# Altium PCB IMUCubeCTRL_Pcb.PcbDoc
Units mil, origin at the board's own origin, x right, y up, seen from the top; angles counter-clockwise.
Board outline 866.14 x 866.14 mil, 2 copper layers (Top Layer, Bottom Layer), stack 38.583 mil thick; 27 components, 34 nets, 158 pads, 22 vias.
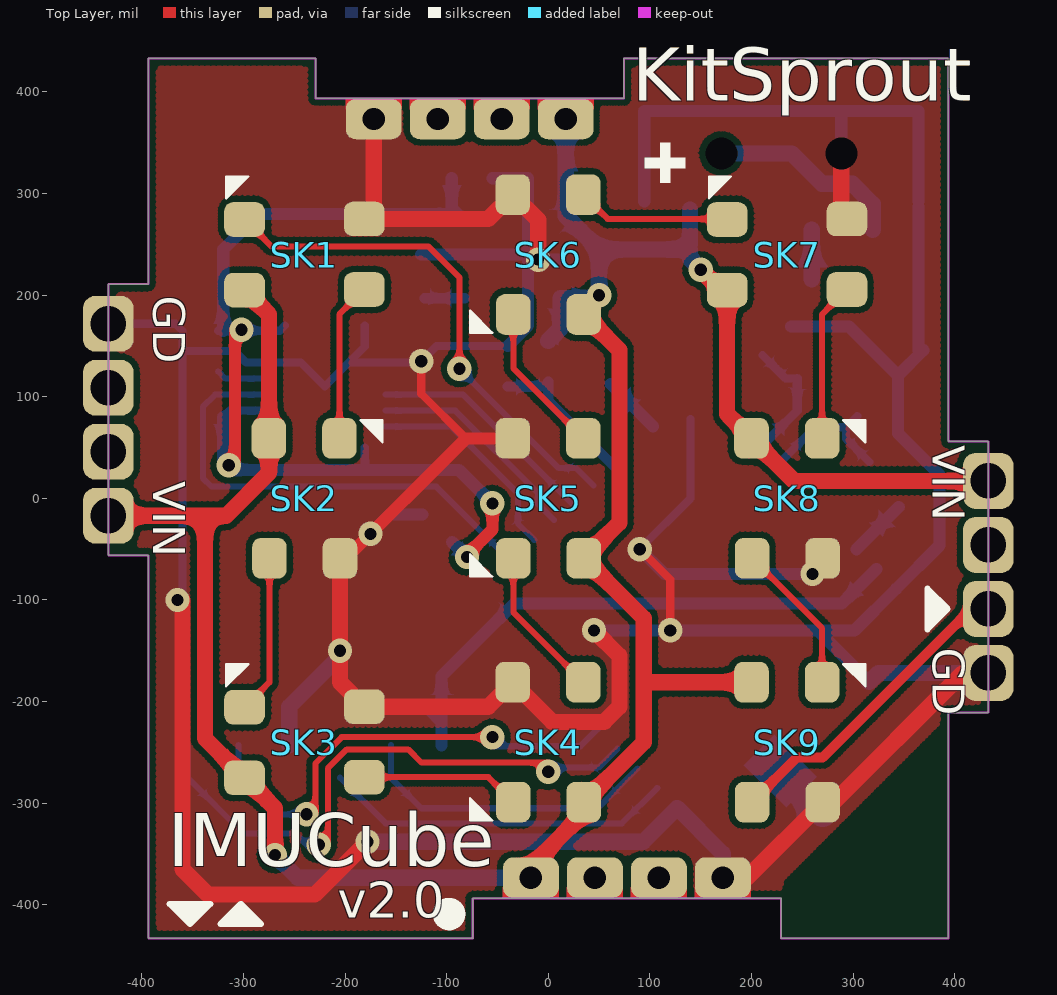
[diagram p0: Top Layer view]
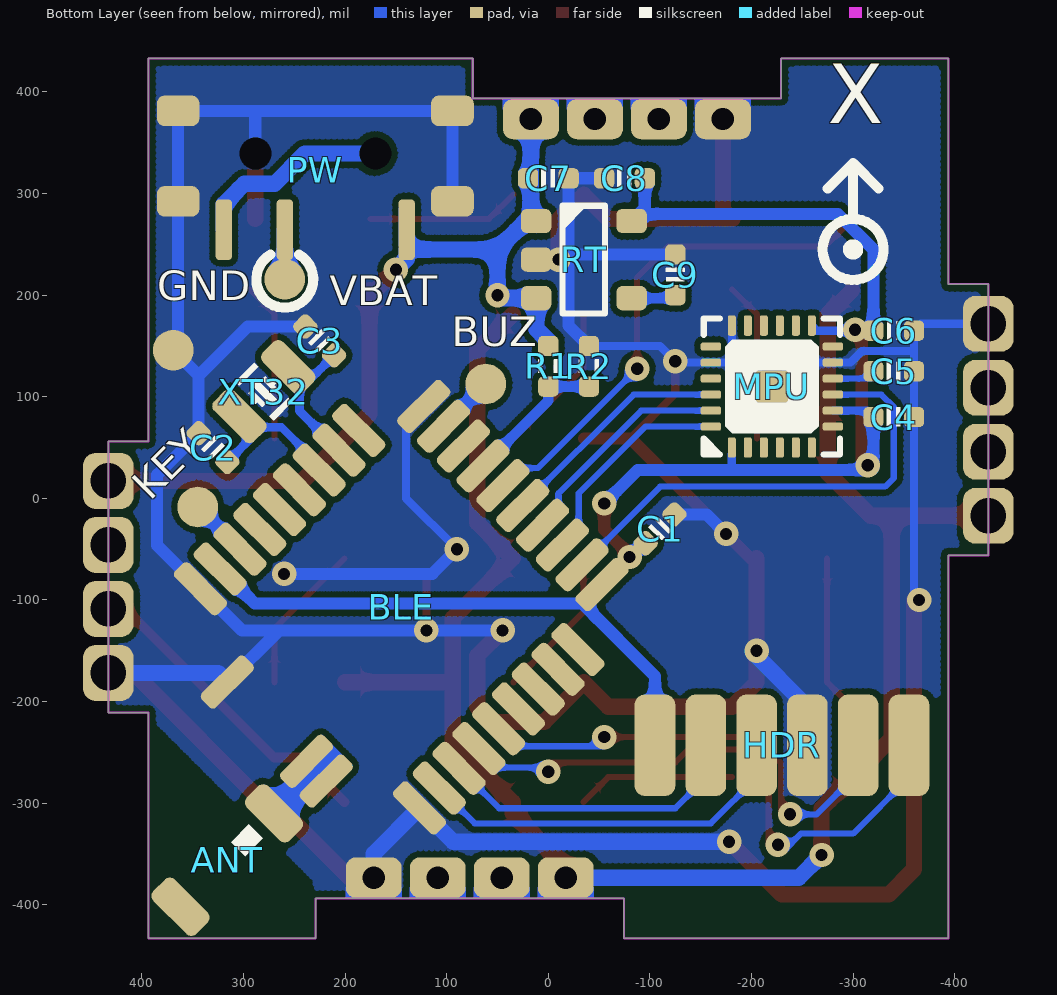
[diagram p1: Bottom Layer view, seen from below]
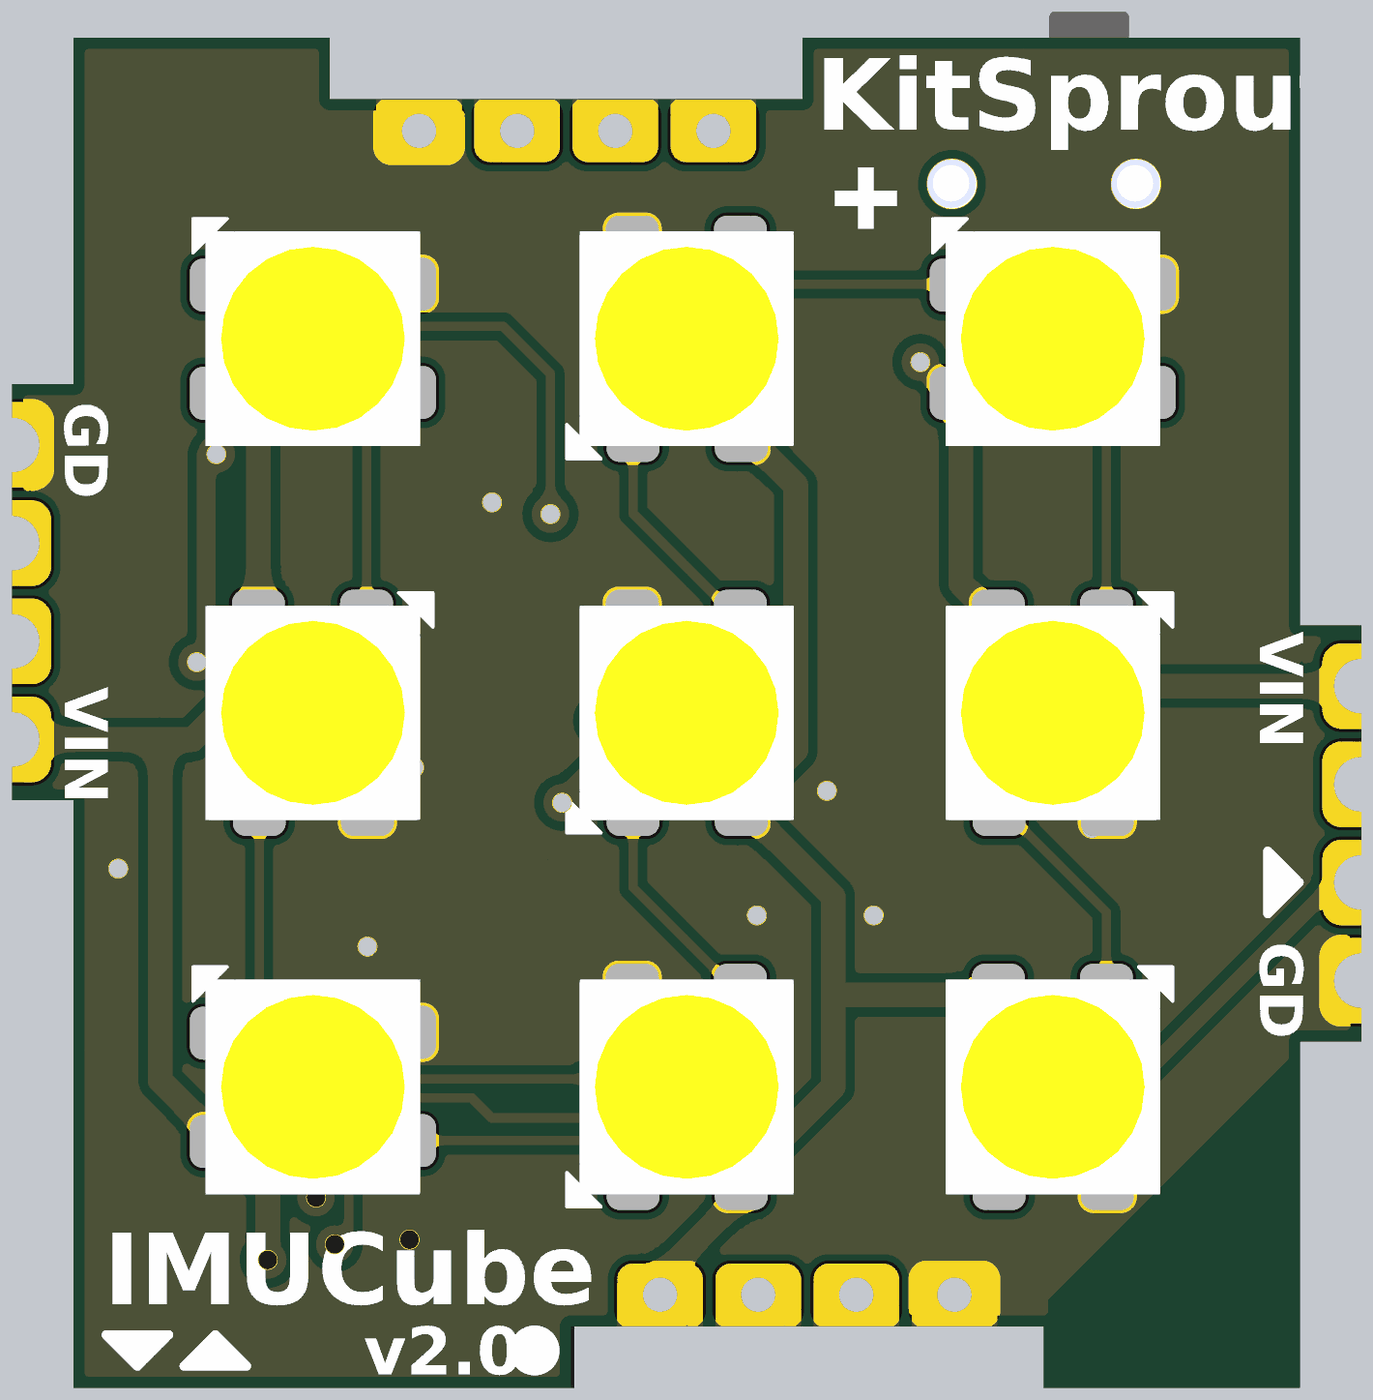
[diagram p2: 3D render of the assembled board from above, using the file's embedded part models]
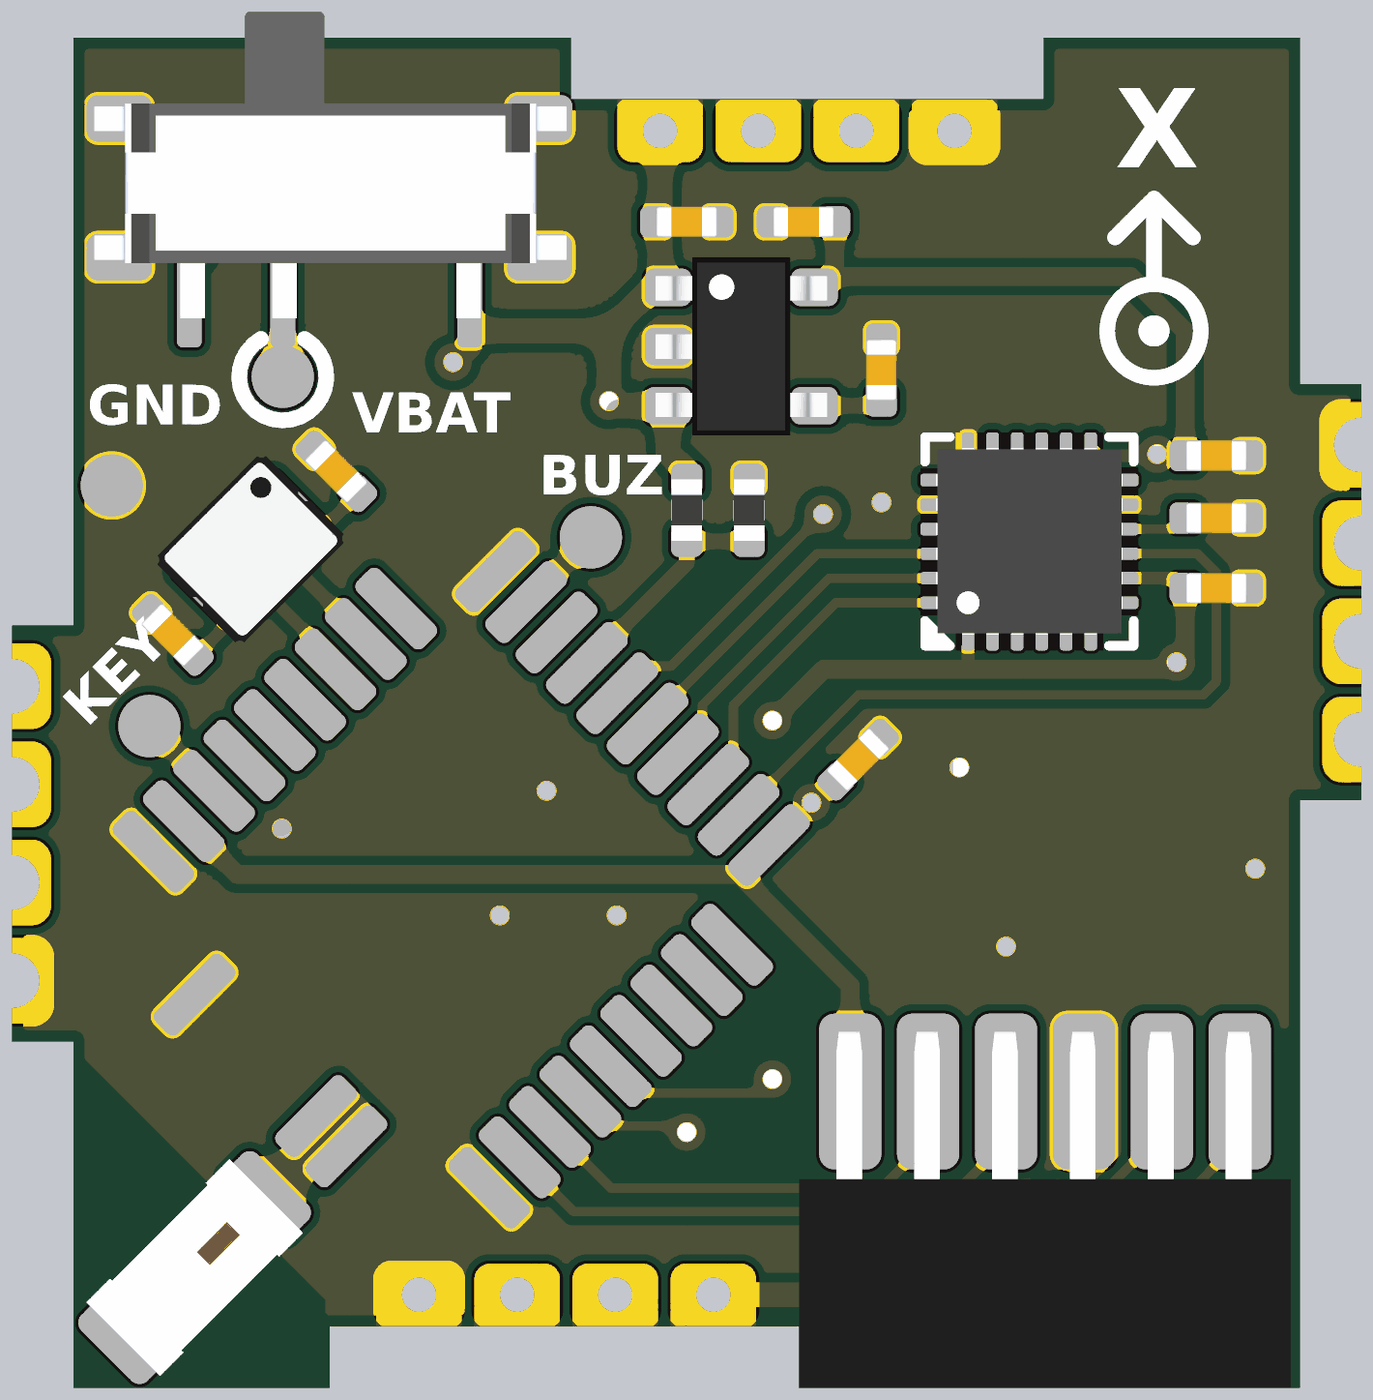
[diagram p3: 3D render of the assembled board from below, using the file's embedded part models]

## Layer stack, top to bottom
Top Solder: solder mask 0.3937, Solder Resist, Dk 3.5
Top Layer: signal copper 1.5748
Dielectric 1: dielectric 35.4331, FR-4, Dk 4.8
Bottom Layer: signal copper 1.5748
Bottom Solder: solder mask 0.3937, Solder Resist, Dk 3.5

## Board outline
-433.07,-56.06 -393.7,-56.06 -393.7,-433.07 -74.37,-433.07 -74.37,-393.7 229.09,-393.7 229.09,-433.07 393.7,-433.07 393.7,-210.79 433.07,-210.79 433.07,56.06 393.7,56.06 393.7,433.07 74.37,433.07 74.37,393.7 -229.09,393.7 -229.09,433.07 -393.7,433.07 -393.7,210.79 -433.07,210.79

## Design rules (kind name [scope] priority, off if disabled: settings)
Clearance ClearancePolygon [InPolygon] p1: gap=6
Clearance [All] p2: gap=6
ComponentClearance [All] p1: gap=0 collisioncheckmode=3 verticalgap=0 showdistances=FALSE
Height [All] p1: minheight=0 maxheight=5000 prefheight=500
HoleSize [All] p1: absolutevalues=TRUE maxlimit=200 minlimit=1 maxpercent=80.000 minpercent=20.000
HoleToHoleClearance [All] p1: gap=6 allowstackedmicrovias=TRUE
MinimumSolderMaskSliver [All] p1: minsoldermaskwidth=0
PolygonConnect [All] p1: connectstyle=Direct reliefconductorwidth=10 reliefentries=4 polygonreliefangle="90 Angle" airgapwidth=10
RoutingVias [All] p1: holewidth=12 width=24 viastyle="Through Hole" minholewidth=12 minwidth=20 maxholewidth=28 maxwidth=50
SilkToSilkClearance [All] p1: silktosilkclearance=0
SilkToSolderMaskClearance [IsPad] p1: minsilkscreentomaskgap=0 clearancetoexposedcopper=TRUE
SolderMaskExpansion [All] p1: expansion=2
Width [All] p1: maxlimit=50 minlimit=6 preferedwidth=10
23 further rules are at their usual default settings.

## Classes and differential pairs
component class IMUCubeCTRL_Sch: ANT BLE C1 C2 C3 C4 C5 C6 C7 C8 C9 HDR MPU PW R1 R2 RT XT32

## Components (designator, comment, footprint, x,y, rotation, side; value= is the part's Value field where it differs from the comment)
ANT "Ant_2.4G" ANT_2.4G_3.2x1.6 270,-310 r315 bottom
BLE "MDBT40 nano" "MDBT40 nano" -80,-105 r45 bottom locked
C1 "Cap_0402" CAP_0402 -110,-30 r315 bottom
C2 "Cap_0402" CAP_0402 330,50 r45 bottom
C3 "Cap_0402" CAP_0402 225,155 r45 bottom
C4 "Cap_0402" CAP_0402 -340,80 r0 bottom
C5 "Cap_0402" CAP_0402 -340,125 r0 bottom
C6 "Cap_0402" CAP_0402 -340,165 r0 bottom
C7 "Cap_0402" CAP_0402 0,315 r180 bottom
C8 "Cap_0402" CAP_0402 -75,315 r0 bottom
C9 "Cap_0402" CAP_0402 -125,220 r90 bottom
HDR "HDR1x6_1.27" HDR1X6_1.27_180HFD -355,-243 r270 bottom locked
MPU "MPU6500" QFN_P0.4_24 -220,110 r90 bottom
PW "SwitchSPDT_2.8x6.6_90" SwitchSPDT_2.8X6.6_90 229.37,339.37 r0 bottom
R1 "Res_0402" RES_0402 0,130 r270 bottom
R2 "Res_0402" RES_0402 -40,130 r270 bottom
RT "RT9193" SOT23-5 -35,235 r180 bottom
SK1 "LED_3535_SK6812" LED_3535_4P -240,240 r180 top locked
SK2 "LED_3535_SK6812" LED_3535_4P -240,0 r90 top locked
SK3 "LED_3535_SK6812" LED_3535_4P -240,-240 r180 top locked
SK4 "LED_3535_SK6812" LED_3535_4P 0,-240 r270 top locked
SK5 "LED_3535_SK6812" LED_3535_4P 0,0 r270 top locked
SK6 "LED_3535_SK6812" LED_3535_4P 0,240 r270 top locked
SK7 "LED_3535_SK6812" LED_3535_4P 235,240 r180 top locked
SK8 "LED_3535_SK6812" LED_3535_4P 235,0 r90 top locked
SK9 "LED_3535_SK6812" LED_3535_4P 235,-240 r90 top locked
XT32 "XTAL_32.768kHz" XT_2012_2 280,105 r315 bottom

## Footprints (in the part's own frame and the unit in brackets; to place one, negate y for a bottom-side part, rotate by r counter-clockwise, add the part's x,y. Pads: shape width x height; smd on the part's side, far side on the other; paste and mask are expansions set on the pad)
ANT_2.4G_3.2x1.6 [mil]
  rrect50% 30x60 smd: 1(0,0) 2(130,0)
  silkscreen extent 25,-10 50,10, body extent 0,-33 130,33, height 53
CAP_0402 [mil]
  rrect50% 20x20 smd: 1(-20,0) 2(20,0)
  silkscreen extent -7,-9 7,9, body extent -20,-10 20,10, height 20
HDR1X6_1.27_180HFD [mil]
  rrect50% 100x40 smd: 1(0,0) 2(0,-50) 3(0,-100) 4(0,-150) 5(0,-200) 6(0,-250)
  body extent -38,-283 190,33, height 71
LED_3535_4P [mil]
  rrect50% 40x34 smd: 1(-59,34.45) 2(-59,-35) 3(59,-34.45) 4(59,35)
  silkscreen extent 55,-77 77,-55, body extent -69,-69 69,69, height 26
"MDBT40 nano" [mil]
  rrect50% 60x20 smd: 1(5,287.4) 2(5,259.84) 3(5,232.28) 4(5,204.72) 5(5,177.17) 6(5,149.61) 7(5,122.05) 8(5,94.49) 9(5,66.93) 20(310,66.93) 21(310,94.49) 22(310,122.05) 23(310,149.61) 24(310,177.17) 25(310,204.72) 26(310,232.28) 27(310,259.84) 28(310,287.4)
  rrect50% 20x60 smd: 10(33.46,5) 11(61.02,5) 12(88.58,5) 13(116.14,5) 14(143.7,5) 15(171.26,5) 16(198.82,5) 17(226.38,5) 18(253.94,5) 19(281.5,5) 29(226.38,333.58) 30(116.14,333.58) 31(88.58,333.58)
QFN_P0.4_24 [mil]
  rrect20% 32x32 smd: 0(0,0)
  rrect50% 20x8 smd: 1(-60,39.37) 2(-60,23.62) 3(-60,7.87) 4(-60,-7.87) 5(-60,-23.62) 6(-60,-39.37) 13(60,-39.37) 14(60,-23.62) 15(60,-7.87) 16(60,7.87) 17(60,23.62) 18(60,39.37)
  rrect50% 8x20 smd: 7(-39.37,-60) 8(-23.62,-60) 9(-7.87,-60) 10(7.87,-60) 11(23.62,-60) 12(39.37,-60) 19(39.37,60) 20(23.62,60) 21(7.87,60) 22(-7.87,60) 23(-23.62,60) 24(-39.37,60)
  silkscreen extent -67,-67 67,67, body extent -60,-60 60,60, height 39
RES_0402 [mil]
  rrect50% 20x20 smd: 1(-20,0) 2(20,0)
  silkscreen extent -7,-10 7,10, body extent -20,-10 20,10, height 14
SOT23-5 [mil]
  rrect50% 30x24 smd: 1(-47,38) 2(-47,0) 3(-47,-38) 4(47,-38) 5(47,38)
  silkscreen extent -21,-53 21,53, body extent -55,-57 55,57, height 57
SwitchSPDT_2.8X6.6_90 [mil]
  rrect50% 42x30 smd: 0(-135,-42) 0(-135,47) 0(135,-42) 0(135,47)
  round 10 hole 31.5: 0(-59.06,0) 0(59.06,0)
  rrect50% 16x60 smd: 1(90,75) 2(30,75) 3(-90,75)
  body extent -152,-111 151,86, height 55
XT_2012_2 [mil]
  rrect50% 28x56 smd: 1(-34,0) 2(34,0)
  silkscreen extent -15,-27 15,27, body extent -49,-39 49,39, height 31

## Part data
ANT: "Antenna"
BLE: "Module"
C1 C2 C3 C4 C5 C6 C7 C8 C9: "Capacitor"
HDR: "Header"
MPU: library part MPU925x, "Sensor Motion"
PW: "Switch"
R1 R2: "Resistor"
RT: "Power"
SK1 SK2 SK3 SK4 SK5 SK6 SK7 SK8 SK9: "LED"
XT32: library part XTAL_32.768k, "Crystal Oscillator"

## Free pads (board coordinates)
  rrect50% 50x55 hole 35: 0(-433.07,-17.13) 0(-433.07,45.87) 0(-433.07,108.86) 0(-433.07,171.85) 0(433.07,-171.85) 0(433.07,-108.86) 0(433.07,17.13) 0(433.07,-45.87)
  rrect50% 55x40 hole 22: 0(-171.85,373.37) 0(-108.86,373.37) 0(-45.87,373.37) 0(-17.13,-373.37) 0(17.13,373.37) 0(45.87,-373.37) 0(108.86,-373.37) 0(171.85,-373.37)
  round 40 smd far side: 1(61.55,112.57) 1(259.37,215.63) 1(345,-8.5) 1(369.14,145.86)

## Via types
v1: diameter 24, hole 12, Top Layer to Bottom Layer, 22 vias

## Nets (pads, with @x,y where several pads share a name; then routed paths per layer and width w, separated by ;. In a path a pad name is that pad's centre, name@x,y a point inside that pad or via, vN(x,y) a via of type N, cw(c..) or ccw(c..) an arc to the next point about the centre after c; other vN are vias at no path point)
3V3: BLE.10 BLE.27 C1.2 C4.2 C6.2 C8.1 HDR.6 MPU.1 MPU.8 MPU.13 RT.5 | length 1626.1
  Top Layer w12: v1@-308.5,32.5 v1@-308.5,166 ; v1(-80,-57.67) -80,-55.56 -55,-30.56 v1(-55,-5)
  Bottom Layer w8: C6.2@-325,165 C6.2 -264.37,165 MPU.13 ; C4.2 -313.62,86.38 MPU.8 ; -180.63,28 MPU.1
  Bottom Layer w12: C4.2 -320,30 -318,28 -180.63,28 -88,28 v1(-55,-5) ; C6.2 -320,245 -285,280 RT.5@-95,280 ; HDR.6@-117.35,-207.65 -105,-220 HDR.6 -105,-175 -33.6,-103.6 288.87,-103.6 BLE.27 ; C8.1 -95,286 RT.5 ; C1.2@-94.69,-42.98 v1(-80,-57.67)
  other v1: -314.5,32.5 -302,166
AD_VBAT: BLE.16 R1.2 R2.2 | length 149.5
  Bottom Layer w10: R2.2 R1.2 ; R1.2@0,115 0,96.17 BLE.16
BUZZER: BLE.18 pad.1@61.55,112.57 | length 58.8
  Bottom Layer w12: pad.1@61.55,112.57 BLE.18
CSM: BLE.14 MPU.22 | length 230.3
  Bottom Layer w6: MPU.22 -83.9,102.13 BLE.14
DOUT: BLE.15 SK1.3 | length 504.8
  Top Layer w6: SK1.3 -272.55,248 -118,248 -87.5,217.5 v1(-87.5,127.5)
  Bottom Layer w6: v1(-87.5,127.5) 10,30 27.2,30 BLE.15
GND: BLE.1 BLE.19 BLE.28 BLE.29 C1.1 C2.2 C3.2 C4.1 C5.1 C6.1 C7.2 C8.2 C9.2 HDR.3 MPU.0 MPU.11 MPU.18 MPU.20 pad.0@171.85,-373.37 pad.0@433.07,-171.85 pad.0@-171.85,373.37 pad.0@-433.07,171.85 pad.1@369.14,145.86 PW.0@94.37,292.37 PW.0@94.37,381.37 PW.0@288.43,339.37 PW.0@364.37,292.37 PW.0@364.37,381.37 R2.1 RT.2 SK1.2 SK2.2 SK3.2 SK4.2 SK5.2 SK6.2 SK7.2 SK8.2 SK9.2 | length 5682.1
  Top Layer w8: v1(-125,135) -125,103 -81,59 ; v1(90,-50) 120,-80 v1(120,-130)
  Top Layer w12: SK2.2@-202,-62 -81,59 SK5.2
  Top Layer w16: v1@-360,-100 -360,-365 -335,-390 -230,-390 v1(-178,-338) ; SK2.2 -205,-181 SK3.2 -59,-205 SK4.2 4,-220 55,-220 70,-205 70,-155 v1(45,-130) ; pad.0@-171.85,373.37 -171.85,284.15 SK1.2 -59,275 SK6.2 -10,274 v1(-10,235) ; pad.0@171.85,-373.37 195.63,-373.37 SK9.2 ; SK9.2@275.5,-304.5 408.15,-171.85 pad.0@433.07,-171.85 ; SK7.2@288.43,275 288.43,334.37
  Bottom Layer w8: pad.0@-433.07,171.85 -366.85,171.85 C6.1 -360,145 ; v1@-360,-100 C4.1 -360,145 ; MPU.18 -180.63,149.37 -196.38,133.62 ; R2.1 -110,150 -126.38,133.62 MPU.20 -196.38,133.62 ; v1(90,-50) 140,0 BLE.19@140,78.1 ; -360,145 -308.79,145 -297.41,133.62 MPU.11 -243.62,133.62 MPU.0 -196.38,133.62
  Bottom Layer w12: v1(-175,-35) -155.86,-15.86 C1.1 ; C9.2 v1@-10,240 ; C8.2 C7.2 v1@-20,235 ; R2.1 -20,170 v1@-20,235 ; RT.2 v1@-20,235 ; v1(45,-130) 265.15,-130 ; v1(90,-50) 114.31,-74.31 v1(260,-74.31) ; PW.0@94.37,292.37 94.37,381.37 288.43,381.37 ; C3.2 295.86,169.14 344.14,120.86 ; PW.0@288.43,339.37 288.43,381.37 ; BLE.29 265.15,-130 ; pad.1@364.37,145.86 PW.0@364.37,287.37 ; PW.0@364.37,292.37 364.37,381.37 288.43,381.37 ; pad.1@369.14,145.86 344.14,120.86 ; 265.15,-130 301.45,-130 BLE.28 385,-46.45 385,23.28 C2.2 344.14,120.86
  Bottom Layer w16: HDR.3 -255,-205 v1@-201,-151 ; v1(-178,-338) 93.45,-338 BLE.1 171.85,-349.78 pad.0@171.85,-373.37 ; BLE.29 324.91,-171.85 pad.0@433.07,-171.85
  other v1: -205,-150 -365,-100
INTM: MPU.12
KEY: BLE.26 pad.1@345,-8.5 | length 58.8
  Bottom Layer w12: BLE.26 pad.1@345,-8.5
NetANT_1: ANT.1 BLE.30 BLE.31 | length 70.7
  Bottom Layer w27: 220,-260 ANT.1
NetBLE_21: BLE.21 C3.1 XT32.1 | length 130.4
  Bottom Layer w8: C3.1 233.63,118.08 XT32.1@245,118.08
  Bottom Layer w9: BLE.21 245,86.37 XT32.1@245,118.08
NetBLE_22: BLE.22 C2.1 XT32.2 | length 142
  Bottom Layer w8: BLE.22@225.5,32.9 262.6,70 XT32.2@293.08,70 ; XT32.2 XT32.2@293.08,70 ; C2.1 293.08,58.63 XT32.2@293.08,70
NetBUZZER_N: 
NetC9_1: C9.1 RT.4 | length 40
  Bottom Layer w10: C9.1@-122,197 RT.4
NetQ1_1: 
NetSK1_1: SK1.1 SK2.3 | length 156.7
  Top Layer w6: SK2.3 -205.55,181 SK1.1
NetSK2_1: SK2.1 SK3.3 | length 156.7
  Top Layer w6: SK3.3 -274.45,-181 SK2.1
NetSK3_1: SK3.1 SK4.3 | length 156.7
  Top Layer w6: SK3.1 -59,-274.45 SK4.3
NetSK4_1: SK4.1 SK5.3 | length 150.5
  Top Layer w6: SK5.3 -34.45,-112.1 SK4.1
NetSK5_1: SK5.1 SK6.3 | length 150.5
  Top Layer w6: SK6.3 -34.45,127.9 SK5.1
NetSK6_1: SK6.1 SK7.3 | length 150.5
  Top Layer w6: SK6.1 58.45,275 SK7.3@175,275
NetSK7_1: SK7.1 SK8.3 | length 156.7
  Top Layer w6: SK8.3 269.45,181 SK7.1
NetSK8_1: SK8.1 SK9.3 | length 150.5
  Top Layer w6: SK8.1 269.45,-127.9 SK9.3
NEXT: pad.0@433.07,-108.86 SK9.1 | length 311.3
  Top Layer w10: SK9.1 244.55,-255 270,-255 416.14,-108.86 pad.0@433.07,-108.86
REG: C5.2 MPU.10 | length 48
  Bottom Layer w6: C5.2@-325,125 -317.87,117.87 MPU.10
RX: BLE.5 HDR.2 | length 456.9
  Top Layer w6: v1@-229.14,-311 -229.14,-260.87 -203.27,-235 v1(-55,-235)
  Bottom Layer w6: HDR.2 -305,-270 -264,-311 v1(-238,-311) ; v1@-55,-244 31.55,-244 BLE.5
SCK: BLE.13 MPU.23 | length 216.6
  Bottom Layer w6: MPU.23 -91.38,86.38 -10.07,5.07 -10.07,-5.68 BLE.13@5.66,-21.41
SDI: BLE.12 MPU.24 | length 209.8
  Bottom Layer w6: MPU.24 -95.63,70.63 -30,5 -30,-24.73 BLE.12@-13.83,-40.9
SDO: BLE.11 MPU.9 | length 477.1
  Bottom Layer w6: MPU.9 -327.87,102.13 -340,90 -340,20 -331.5,11.5 -110.2,11.5 BLE.11
SWCLK: BLE.2 HDR.4 | length 345.3
  Bottom Layer w6: HDR.4@-205,-275 -160,-320 72.47,-320 BLE.2
SWDIO: BLE.3 HDR.5 | length 303.5
  Bottom Layer w6: HDR.5 -155,-275 -125,-305 48.5,-305 BLE.3
TX: BLE.4 HDR.1 | length 568.1
  Top Layer w6: v1@-217,-341 -217,-265.7 -198.3,-247 -138,-247 -125,-260 v1@0,-260
  Bottom Layer w6: HDR.1 -355,-275 -300,-330 -248.7,-330 v1@-231.85,-346.85 ; v1(0,-269) 4,-265 49.52,-265 BLE.4
  other v1: -226,-341
VBAT: pad.1@259.37,215.63 PW.2 | length 48.7
  Bottom Layer w16: pad.1@259.37,215.63 PW.2
VCHARGE: PW.0@170.31,339.37 PW.1 | length 194.9
  Bottom Layer w16: PW.0@170.31,339.37 239.63,339.37 269.38,309.62 299.38,309.62 319.37,289.63 PW.1
VIN: C7.1 pad.0@17.13,373.37 pad.0@433.07,17.13 pad.0@-17.13,-373.37 pad.0@-433.07,-17.13 PW.3 R1.1 RT.1 RT.3 SK1.4 SK2.4 SK3.4 SK4.4 SK5.4 SK6.4 SK7.4 SK8.4 SK9.4 | length 2594.4
  Top Layer w16: pad.0@-433.07,-17.13 -317.13,-17.13 -275,25 SK2.4 -275,181 SK1.4 ; -338,-17.13 -338,-236 SK3.4 -269,-305 v1(-269,-351) ; pad.0@-17.13,-373.37 -17.13,-362.13 35,-310 SK4.4 94,-240 94,-181 SK9.4 ; SK6.4 70,146 70,-24 SK5.4 94,-118 94,-179 ; v1(150,225) SK7.4@167,208 ; SK7.4 176,83 241.87,17.13 pad.0@433.07,17.13
  Bottom Layer w16: v1(-269,-351) -246.63,-373.37 pad.0@-17.13,-373.37 ; R1.1@0,155 12,167 RT.3 v1@47,197 ; pad.0@17.13,373.37 17.13,277.87 50,245 ; v1(50,200) 50,245 ; PW.3@139.37,250 PW.3@139.37,284.37 ; v1(150,225) 139.37,235.63 139.37,245 50,245
pads on no net: ANT.2 BLE.6 BLE.7 BLE.8 BLE.9 BLE.17 BLE.20 BLE.23 BLE.24 BLE.25 MPU.2 MPU.3 MPU.4 MPU.5 MPU.6 MPU.7 MPU.14 MPU.15 MPU.16 MPU.17 MPU.19 MPU.21

## Polygon pours and split planes (outlines as drawn)
no net on Keep-Out Layer "keepout" (none): -433.07,-56.06 -393.7,-56.06 -393.7,-433.07 -74.37,-433.07 -74.37,-393.7 229.09,-393.7 229.09,-433.07 393.7,-433.07 393.7,-210.79 433.07,-210.79 433.07,56.06 393.7,56.06 393.7,433.07 74.37,433.07 74.37,393.7 -229.09,393.7 -229.09,433.07 -393.7,433.07 -393.7,210.79 -433.07,210.79
GND on Top Layer "topLayer" (hatched 45Degree grid 4 track 6, remove dead copper, pour order 2): -433.07,-56.06 -393.7,-56.06 -393.7,-433.07 -74.37,-433.07 -74.37,-393.7 229.09,-393.7 229.09,-433.07 393.7,-433.07 393.7,-210.79 433.07,-210.79 433.07,56.06 393.7,56.06 393.7,433.07 74.37,433.07 74.37,393.7 -229.09,393.7 -229.09,433.07 -393.7,433.07 -393.7,210.79 -433.07,210.79
GND on Bottom Layer "bottomLayer" (hatched 45Degree grid 4 track 6, remove dead copper, pour order 3): -433.07,-56.06 -393.7,-56.06 -393.7,-433.07 -74.37,-433.07 -74.37,-393.7 229.09,-393.7 229.09,-433.07 393.7,-433.07 393.7,-210.79 433.07,-210.79 433.07,56.06 393.7,56.06 393.7,433.07 74.37,433.07 74.37,393.7 -229.09,393.7 -229.09,433.07 -393.7,433.07 -393.7,210.79 -433.07,210.79

## Other copper
Top Layer:
  pour cut-out: 393.7,-210.79 229.09,-375.39 229.09,-433.07 393.7,-433.07
Bottom Layer:
  pour cut-out: 393.7,-210.79 229.09,-375.39 229.09,-433.07 393.7,-433.07
  region net NetANT_1: 222.5,-232.5 192.5,-262.5 234,-304 264,-274
Multi-Layer:
  region net GND: 199.35,-382.87 144.35,-382.87 144.35,-393.37 199.35,-393.37
  region: 136.36,-382.87 81.36,-382.87 81.36,-393.37 136.36,-393.37
  region: 73.37,-382.87 18.37,-382.87 18.37,-393.37 73.37,-393.37
  region net VIN: -10.37,382.87 44.63,382.87 44.63,393.37 -10.37,393.37
  region: -136.36,382.87 -81.36,382.87 -81.36,393.37 -136.36,393.37
  region net GND: -199.35,382.87 -144.35,382.87 -144.35,393.37 -199.35,393.37
  region net VIN: 10.37,-382.87 -44.63,-382.87 -44.63,-393.37 10.37,-393.37
  region: -73.37,382.87 -18.37,382.87 -18.37,393.37 -73.37,393.37

## Silkscreen, mask and mechanical layers (free items; w line width, h text height)
Top Overlay:
  circle w16: c-97.66,-409.13 r8
  region: -302.66,-399.13 -282.66,-419.13 -322.66,-419.13
  region: -352.66,-419.13 -372.66,-399.13 -332.66,-399.13
  region: 120,350 110,350 110,335 95,335 95,325 110,325 110,310.63 120,310.63 120,325 135,325 135,335 120,335
  region: 393.07,-108.86 373.07,-128.86 373.07,-88.86
  lines w6: -372.66,-399.13 -332.66,-399.13 -352.66,-419.13 -372.66,-399.13 ; -322.66,-419.13 -282.66,-419.13 -302.66,-399.13 -322.66,-419.13 ; 373.07,-128.86 393.07,-108.86 373.07,-88.86 373.07,-128.86
  text "KitSprout" at 82.65,374.18 h90
  text "GD" at -399.37,199.61 h54 r270
  text "VIN" at 368.07,52.13 h54 r270
  text "VIN" at -399.37,16.65 h54 r270
  text "GD" at 368.07,-146.85 h54 r270
  text "IMUCube" at -374.37,-379.37 h90
  text "v2.0" at -207.37,-424.37 h60
Bottom Overlay:
  circle w10: c-300,245 r5
  circle w10: c-300,245 r30
  lines w10: -325,305 -300,330 ; -300,275 -300,330 ; -275,305 -300,330 ; 245.37,239.88 ccw(c259.37,215.63) 273.37,239.88
  text "X" at -275,350 h100
  text "GND" at 385,185 h50
  text "VBAT" at 215,180 h50
  text "BUZ" at 95,140 h50
  text "KEY" at 385,-10 h50 r315
Mechanical 1:
  the board outline again, w2